# Altium PCB Digital_Clock_Backup_PCB.PcbDoc
Units mil, origin at the board's own origin, x right, y up, seen from the top; angles counter-clockwise.
Board outline 4763.81 x 1614.2 mil, 2 copper layers (Top Layer, Bottom Layer); 26 components, 30 nets, 116 pads, 14 vias.
Unrouted connection lines stored in the file: 2.
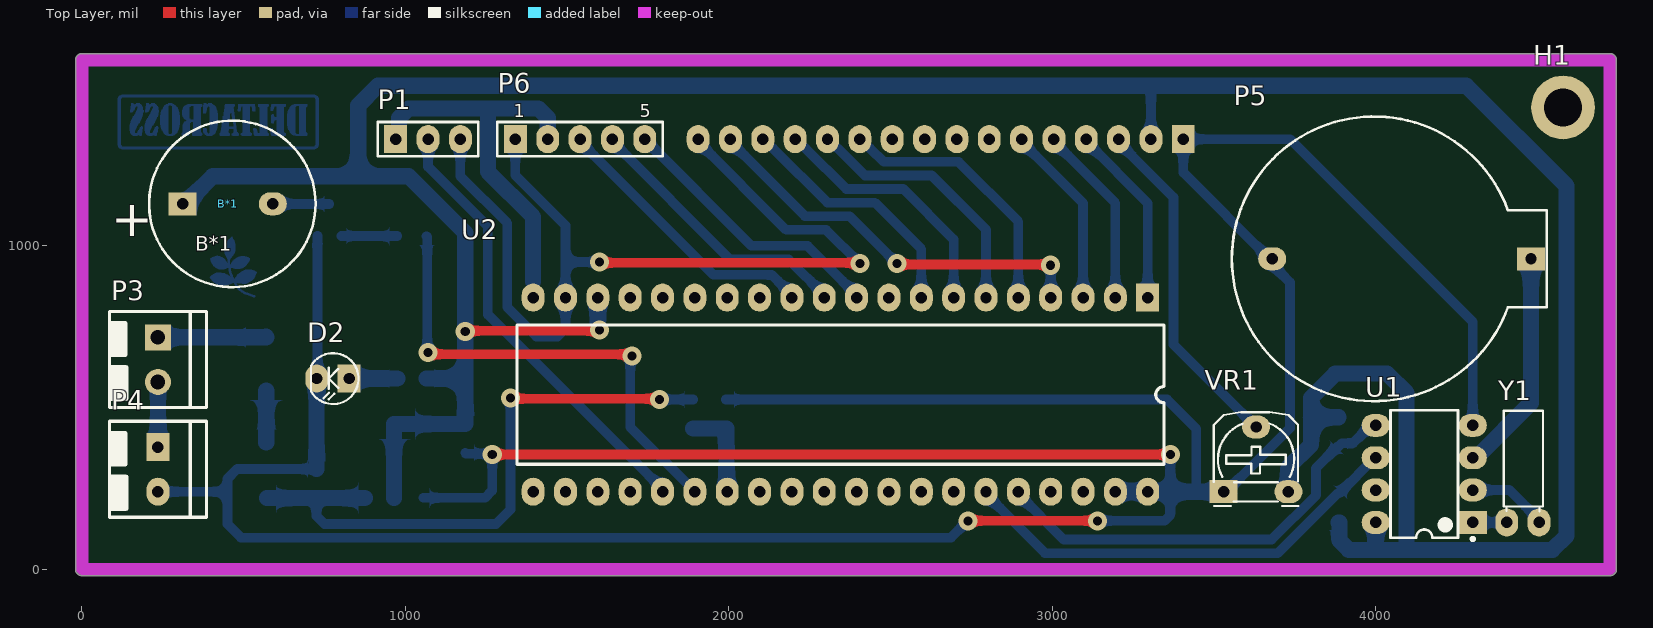
[diagram p0: Top Layer view]
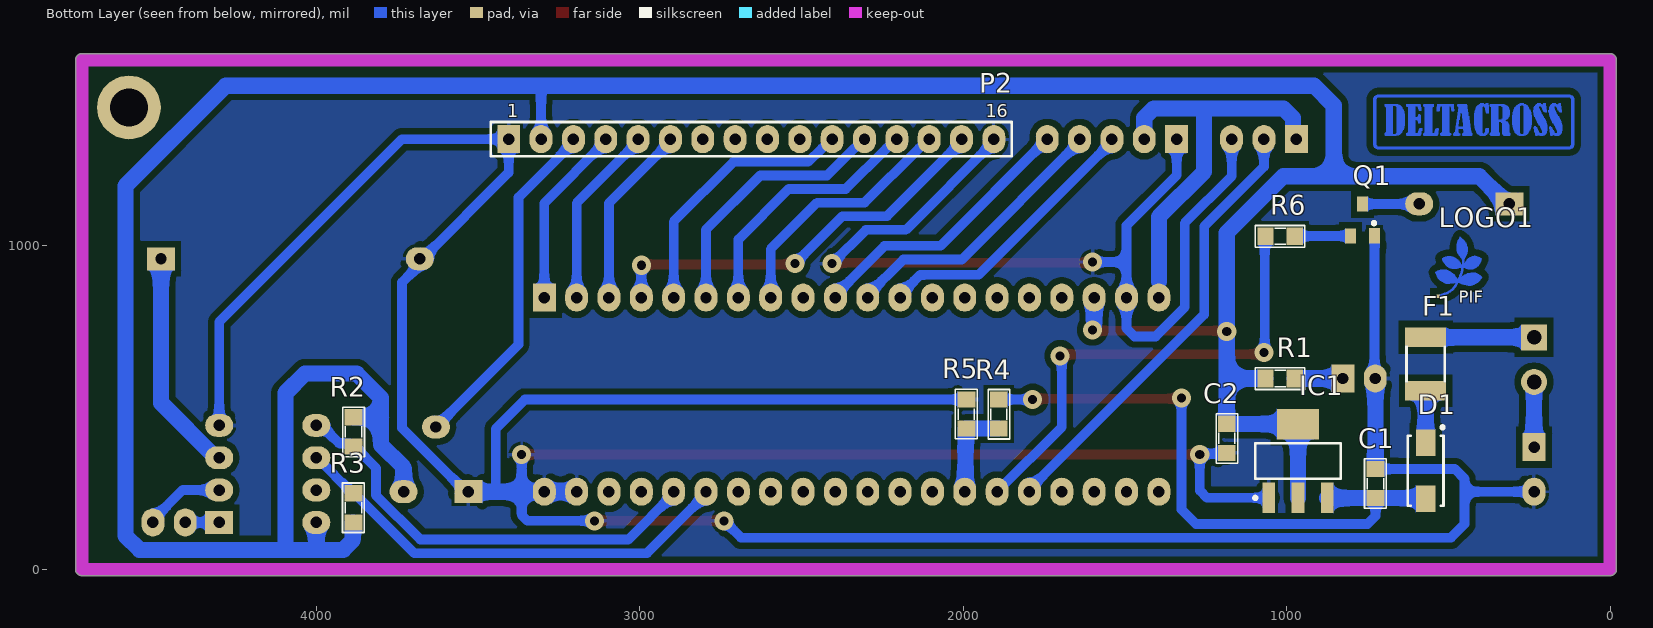
[diagram p1: Bottom Layer view, seen from below]
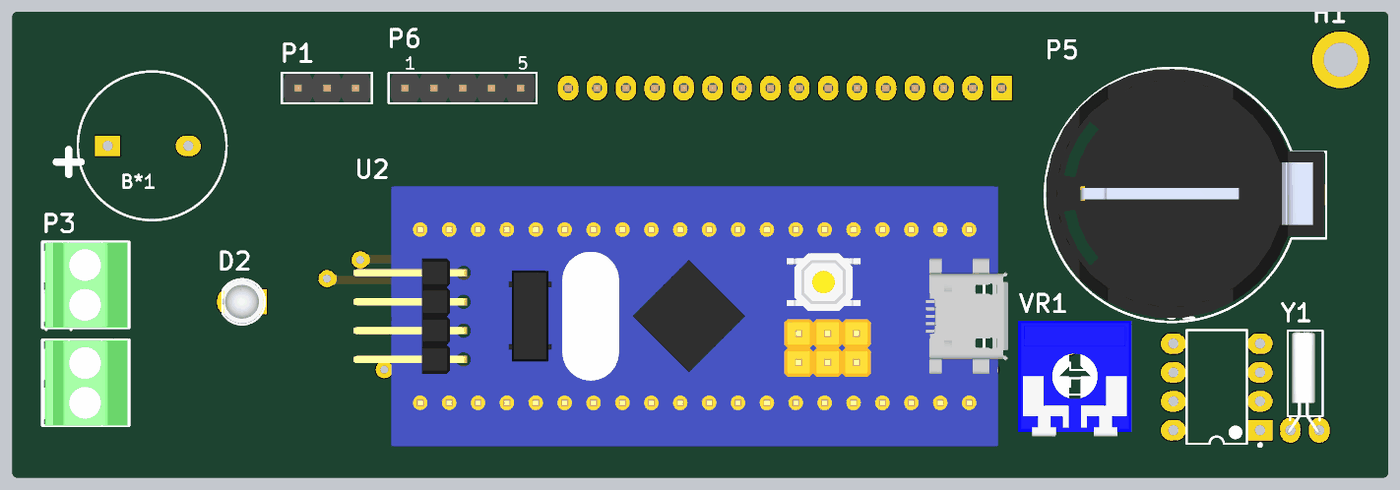
[diagram p2: 3D render of the assembled board from above, using the file's embedded part models]
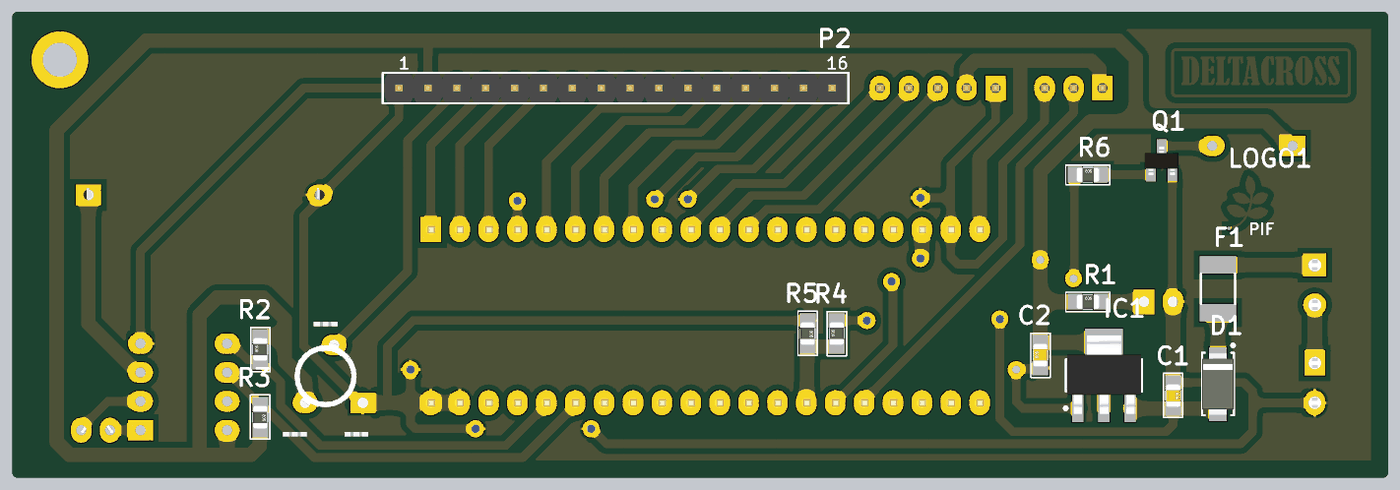
[diagram p3: 3D render of the assembled board from below, using the file's embedded part models]

## Layer stack, top to bottom
Top Solder: solder mask 0.4, Solder Resist, Dk 3.5
Top Layer: signal copper 1.4
Dielectric 1: dielectric 12.6, FR-4, Dk 4.8
Bottom Layer: signal copper 1.4
Bottom Solder: solder mask 0.4, Solder Resist, Dk 3.5

## Board outline
0,-19.7 cw(c0,0) -19.7,0 -19.7,1574.8 cw(c0,1574.8) 0,1594.5 4724.41,1594.5 cw(c4724.41,1574.8) 4744.11,1574.8 4744.11,0 cw(c4724.41,0) 4724.41,-19.7

## Design rules (kind name [scope] priority, off if disabled: settings)
Clearance [All] p1: gap=20 ignorepadtopadclearanceinfootprint=FALSE
PolygonConnect [All] p1: connectstyle=Relief reliefconductorwidth=10 reliefentries=4 polygonreliefangle="90 Angle" airgapwidth=10
RoutingVias [All] p1: holewidth=28 width=50 viastyle="Through Hole" minholewidth=23.62 minwidth=59.06 maxholewidth=28 maxwidth=50
SolderMaskExpansion [All] p1: expansion=4 istentingtop=FALSE
Width [All] p1: maxlimit=50 minlimit=20 preferedwidth=30
30 further rules are at their usual default settings.

## Components (designator, comment, footprint, x,y, rotation, side; value= is the part's Value field where it differs from the comment)
B*1 "Buzzer" BUZZER 390,1130 r0 top
C1 "Cap Non-Pol SMD" CAP-SM-0805 725,310 r270 bottom value=10uF
C2 "Cap Non-Pol SMD" CAP-SM-0805 1185,360 r90 bottom value=10uF
D1 "D Schottky" SS34 570,305 r270 bottom
D2 "LED" LED-3mm 826,590 r180 top
F1 "Fuse" "FUSE SMD" 570,635 r270 bottom
H1 "Hole" "LO KHOAN 3MM" 4579,1428 r0 top
IC1 "LM1117" SOT223-4N 965,335 r90 bottom value=LM317
LOGO1 "LOGO PIF" "PIF LOGO SMALL TOP" 341,1033 r180 bottom
P1 "61300311121" 61300311121 1070,1330 r0 top
P2 "61301611121" 61301611121 2655,1330 r180 bottom
P3 "Domino 2" "DOMINO SMALL 2"#1 285,717 r270 top
P4 "Domino 2" "DOMINO SMALL 2"#2 285,377.8 r270 top
P5 "VBAT" "VBAT CR2030" 4080,960 r0 top
P6 "61300511121" 61300511121 1540,1330 r0 top
Q1 "C1815" SOT23B 765,1080 r180 bottom
R1 "RESISTOR SMD" RES-SM-0805 1065,590 r180 bottom value=1K
R2 "RESISTOR SMD" RES-SM-0805 3885,380 r90 bottom value=10K
R3 "RESISTOR SMD" RES-SM-0805 3885,235 r270 bottom value=10K
R4 "RESISTOR SMD" RES-SM-0805 1890,435 r90 bottom value=20K
R5 "RESISTOR SMD" RES-SM-0805 1990,525 r270 bottom value=10K
R6 "RESISTOR SMD" RES-SM-0805 1065,1030 r180 bottom value=22K
U1 "DS1307+" MAXM-P8-1 4150,295 r180 top
U2 "BLUEPILL" BLUEPILL 2340,520 r270 top
VR1 "10K" "Varistor 1" 3530,240 r0 top value="VR 10K"
Y1 "32.768kHz" "XTAL 32768 3x8" 4505,145 r90 top

## Footprints (in the part's own frame and the unit in brackets; to place one, negate y for a bottom-side part, rotate by r counter-clockwise, add the part's x,y. Pads: shape width x height; smd on the part's side, far side on the other; paste and mask are expansions set on the pad)
61300311121 [mm] "Pin Header, pitch 2.54 mm, THT, Vertical, single row, 3p"
  rect 1.8x2.2 hole 0.9: 1(-2.54,0)
  oval 1.8x2.2 hole 0.9: 2(0,0) 3(2.54,0)
  silkscreen extent -3.96,-1.35 3.96,1.35, body extent -3.81,-1.27 3.81,1.27, height 8.57
61300511121 [mm] "Pin Header, pitch 2.54 mm, THT, Vertical, single row, 5p"
  rect 1.8x2.2 hole 0.9: 1(-5.08,0)
  oval 1.8x2.2 hole 0.9: 2(-2.54,0) 3(0,0) 4(2.54,0) 5(5.08,0)
  silkscreen extent -6.5,-1.35 6.5,1.35, body extent -6.35,-1.27 6.35,1.27, height 8.57
61301611121 [mm] "Pin Header, pitch 2.54 mm, THT, Vertical, single row, 16p"
  rect 1.8x2.2 hole 0.9: 1(-19.05,0)
  oval 1.8x2.2 hole 0.9: 2(-16.51,0) 3(-13.97,0) 4(-11.43,0) 5(-8.89,0) 6(-6.35,0) 7(-3.81,0) 8(-1.27,0) 9(1.27,0) 10(3.81,0) 11(6.35,0) 12(8.89,0) 13(11.43,0) 14(13.97,0) 15(16.51,0) 16(19.05,0)
  silkscreen extent -20.47,-1.35 20.47,1.35, body extent -20.32,-1.27 20.32,1.27, height 8.57
BLUEPILL [mm] "Development board STM32F103C8T6"
  rect 2.2x1.8 hole 0.9: 1(-8.128,24.257)
  oval 2.2x1.8 hole 0.9: 2(-8.128,21.717) 3(-8.128,19.177) 4(-8.128,16.637) 5(-8.128,14.097) 6(-8.128,11.557) 7(-8.128,9.017) 8(-8.128,6.477) 9(-8.128,3.937) 10(-8.128,1.397) 11(-8.128,-1.143) 12(-8.128,-3.683) 13(-8.128,-6.223) 14(-8.128,-8.763) 15(-8.128,-11.303) 16(-8.128,-13.843) 17(-8.128,-16.383) 18(-8.128,-18.923) 19(-8.128,-21.463) 20(-8.128,-24.003) 21(7.112,-24.003) 22(7.112,-21.463) 23(7.112,-18.923) 24(7.112,-16.383) 25(7.112,-13.843) 26(7.112,-11.303) 27(7.112,-8.763) 28(7.112,-6.223) 29(7.112,-3.683) 30(7.112,-1.143) 31(7.112,1.397) 32(7.112,3.937) 33(7.112,6.477) 34(7.112,9.017) 35(7.112,11.557) 36(7.112,14.097) 37(7.112,16.637) 38(7.112,19.177) 39(7.112,21.717) 40(7.112,24.257)
  silkscreen extent -5.97,-25.27 4.95,25.53, body extent -11.94,-29.92 10.92,27.64, height 12.31
BUZZER [mm]
  rect 2.2x1.8 hole 0.9: 1(-2,0)
  oval 2.2x1.8 hole 0.9: 2(5.08,0)
  silkscreen extent -4.63,-6.54 8.44,6.54
CAP-SM-0805 [mil]
  rect 50x55 smd: 1(0,0) 2(90,0)
  silkscreen extent -32,-34 121,33, body extent 6,-25 84,25, height 31
"DOMINO SMALL 2"#1 [mil] "3.5 mm"
  rect 80x80 hole 45: 1(0,-50)
  round 80 hole 45: 2(137.8,-50)
  silkscreen extent -80,-203 217,100, body extent -79,-192 217,95, height 335
"DOMINO SMALL 2"#2 [mil] "3.5 mm"
  rect 86.61x70.87 hole 35.43: 1(0,-50)
  oval 86.61x70.87 hole 35.43: 2(137.8,-50)
  silkscreen extent -80,-203 217,100, body extent -79,-192 217,95, height 335
"FUSE SMD" [mm] "SMD FUSE"
  rect 1.55x3.21 smd: 1(-2.1,0) 2(2.1,0)
  silkscreen extent -1.35,-1.5 1.35,1.51, body extent -2.37,-1.71 2.36,1.71, height 0.75
LED-3mm [mm] "LED 2 PIN, 3ly Only colour"
  rect 1.8x2.2 hole 0.9: 1(0,0)
  oval 1.8x2.2 hole 0.9: 2(2.54,0)
  silkscreen extent -0.73,-1.99 3,2.01, body extent -0.63,-1.9 2.87,1.9, height 5.52
"LO KHOAN 3MM" [mm]
  round 5 hole 3: 1(0,0)
MAXM-P8-1 [mm] "DIP, 8-Leads, Body 9.375x6.985mm, Pitch 2.54mm"
  rect 2.2x1.8 hole 0.9: 1(-3.81,3.81)
  oval 2.2x1.8 hole 0.9: 2(-3.81,1.27) 3(-3.81,-1.27) 4(-3.81,-3.81) 5(3.81,-3.81) 6(3.81,-1.27) 7(3.81,1.27) 8(3.81,3.81)
  silkscreen extent -3.94,-5 2.65,5.23, body extent -3.95,-4.95 3.95,4.95, height 4.58
"PIF LOGO SMALL TOP" [mil]
  rect 10x10 smd: 1(-190,-189)
  Top Layer region: -76.29,-64.08 -76.23,-64.06 -71.49,-64.7 -71.45,-64.72 -71.4,-64.72 -66.34,-66.32 -66.33,-66.32 -66.33,-66.32 -61.56,-67.89 -61.49,-67.95 -61.4,-67.97 -55.7,-72.41 -55.64,-72.52 -55.55,-72.6 -55.54,-72.69 -55.5,-72.77 -55.53,-72.89 -55.52,-73.01 -57.42,-78.41 -57.44,-78.43 -57.44,-78.45 -60.94,-86.68 -60.96,-86.71 -60.97,-86.75 -62.87,-89.91 -62.87,-89.91 -62.87,-89.92 -65.41,-94.02 -65.46,-94.06 -65.49,-94.12 -72.46,-100.79 -72.53,-100.82 -72.58,-100.88 -78.58,-104.05 -78.63,-104.05 -78.66,-104.08 -82.46,-105.35 -82.55,-105.34 -82.63,-105.37 -93.4,-105.37 -93.43,-105.36 -93.46,-105.37 -98.86,-104.74 -98.87,-104.73 -98.88,-104.74 -103.31,-104.1 -103.37,-104.07 -103.44,-104.07 -107.24,-102.47 -107.26,-102.44 -107.29,-102.44 -110.76,-100.54 -110.81,-100.48 -110.88,-100.45 -110.93,-100.32 -111.02,-100.22 -111.01,-100.14 -111.04,-100.07 -111.04,-93.43 -111,-93.33 -111,-93.22 -106.56,-83.08 -106.53,-83.05 -106.52,-83.01 -100.82,-74.14 -100.75,-74.09 -100.71,-74.02 -97.24,-71.15 -97.21,-71.14 -97.19,-71.11 -92.76,-68.28 -92.7,-68.27 -92.66,-68.23 -84.43,-65.06 -84.37,-65.06 -84.33,-65.03 -78.93,-64.07 -78.75,-64.11 -78.56,-64.13 -78.55,-64.15 -78.52,-64.16 -78.44,-64.28 -76.36,-64.06
  Top Layer region: -76.29,-64.08 -76.23,-64.06 -71.49,-64.7 -71.45,-64.72 -71.4,-64.72 -66.34,-66.32 -66.33,-66.32 -66.33,-66.32 -61.56,-67.89 -61.49,-67.95 -61.4,-67.97 -55.7,-72.41 -55.64,-72.52 -55.55,-72.6 -55.54,-72.69 -55.5,-72.77 -55.53,-72.89 -55.52,-73.01 -57.42,-78.41 -57.44,-78.43 -57.44,-78.45 -60.94,-86.68 -60.96,-86.71 -60.97,-86.75 -62.87,-89.91 -62.87,-89.91 -62.87,-89.92 -65.41,-94.02 -65.46,-94.06 -65.49,-94.12 -72.46,-100.79 -72.53,-100.82 -72.58,-100.88 -78.58,-104.05 -78.63,-104.05 -78.66,-104.08 -82.46,-105.35 -82.55,-105.34 -82.63,-105.37 -93.4,-105.37 -93.43,-105.36 -93.46,-105.37 -98.86,-104.74 -98.87,-104.73 -98.88,-104.74 -103.31,-104.1 -103.37,-104.07 -103.44,-104.07 -107.24,-102.47 -107.26,-102.44 -107.29,-102.44 -110.76,-100.54 -110.81,-100.48 -110.88,-100.45 -110.93,-100.32 -111.02,-100.22 -111.01,-100.14 -111.04,-100.07 -111.04,-93.43 -111,-93.33 -111,-93.22 -106.56,-83.08 -106.53,-83.05 -106.52,-83.01 -100.82,-74.14 -100.75,-74.09 -100.71,-74.02 -97.24,-71.15 -97.21,-71.14 -97.19,-71.11 -92.76,-68.28 -92.7,-68.27 -92.66,-68.23 -84.43,-65.06 -84.37,-65.06 -84.33,-65.03 -78.93,-64.07 -78.75,-64.11 -78.56,-64.13 -78.55,-64.15 -78.52,-64.16 -78.44,-64.28 -76.36,-64.06
  Top Layer region: -123.07,-4.91 -122.89,-4.93 -122.87,-4.96 -122.84,-4.97 -118.74,-8.14 -118.72,-8.16 -118.7,-8.17 -115.22,-11.32 -112.06,-13.84 -112.04,-13.89 -111.99,-13.91 -107.89,-18.65 -107.88,-18.68 -107.85,-18.69 -104.35,-23.76 -104.34,-23.83 -104.29,-23.87 -101.76,-30.54 -101.76,-30.57 -101.74,-30.6 -99.54,-39.13 -99.55,-39.19 -99.53,-39.25 -99.19,-47.81 -99.22,-47.88 -99.2,-47.95 -101.11,-56.48 -101.14,-56.53 -101.14,-56.58 -104,-63.25 -104.02,-63.26 -104.02,-63.29 -107.19,-69.29 -107.2,-69.3 -107.2,-69.31 -110.03,-74.08 -110.08,-74.11 -110.1,-74.16 -112.97,-77.33 -112.98,-77.34 -112.98,-77.35 -113.01,-77.36 -113.02,-77.38 -113.18,-77.43 -113.34,-77.51 -113.35,-77.5 -113.37,-77.51 -113.39,-77.5 -113.41,-77.51 -113.57,-77.43 -113.73,-77.37 -113.74,-77.35 -113.75,-77.35 -113.76,-77.33 -113.78,-77.31 -125.48,-63.38 -125.48,-63.38 -125.48,-63.38 -128.65,-59.58 -128.67,-59.51 -128.73,-59.45 -130.96,-54.39 -130.96,-54.34 -130.99,-54.3 -132.89,-47 -132.88,-46.96 -132.91,-46.92 -133.54,-40.28 -133.52,-40.23 -133.54,-40.18 -132.57,-29.42 -132.56,-29.4 -132.57,-29.37 -131.3,-22.07 -131.28,-22.04 -131.28,-22 -129.38,-16.3 -129.35,-16.27 -129.35,-16.23 -127.16,-11.8 -125.89,-8.98 -125.87,-8.96 -125.87,-8.93 -123.63,-5.13 -123.6,-5.1 -123.6,-5.07 -123.44,-4.98 -123.3,-4.88 -123.27,-4.88 -123.24,-4.86
  Top Layer region: -155.42,-64.71 -155.38,-64.7 -149.38,-65.67 -149.35,-65.68 -149.32,-65.68 -143.92,-67.25 -143.88,-67.28 -143.82,-67.28 -138.12,-70.15 -138.1,-70.17 -138.08,-70.18 -131.98,-74.08 -131.96,-74.1 -131.94,-74.1 -129.07,-76.3 -129.04,-76.36 -128.98,-76.4 -127.74,-77.95 -125.89,-79.48 -125.85,-79.55 -125.79,-79.59 -124.24,-81.8 -122.36,-83.98 -122.34,-84.02 -122.31,-84.04 -120.72,-86.57 -118.52,-89.72 -118.52,-89.74 -118.5,-89.75 -116.6,-92.92 -116.58,-93.07 -116.53,-93.2 -116.54,-93.23 -116.53,-93.26 -117.16,-98.96 -117.18,-98.99 -117.17,-99.02 -117.28,-99.17 -117.36,-99.32 -117.4,-99.33 -117.42,-99.36 -118.98,-100.33 -119.1,-100.35 -119.19,-100.4 -121.39,-100.7 -126.71,-102.29 -126.73,-102.28 -126.75,-102.29 -130.88,-103.23 -130.89,-103.23 -130.89,-103.23 -135.62,-104.2 -135.68,-104.19 -135.73,-104.21 -139.53,-104.21 -139.55,-104.2 -139.58,-104.21 -148.88,-103.47 -148.95,-103.44 -149.02,-103.44 -154.09,-101.54 -154.11,-101.52 -154.14,-101.52 -161.74,-97.72 -161.79,-97.66 -161.86,-97.64 -167.56,-92.57 -167.58,-92.52 -167.63,-92.5 -172.06,-86.8 -172.07,-86.77 -172.09,-86.76 -174.92,-82.32 -174.93,-82.28 -174.97,-82.24 -177.2,-76.84 -177.2,-76.8 -177.22,-76.77 -178.49,-72.04 -178.47,-71.89 -178.48,-71.73 -178.44,-71.69 -178.44,-71.63 -178.37,-71.58 -178.38,-71.49 -178.36,-71.47 -178.36,-71.45 -178.23,-71.32 -178.11,-71.18 -174.94,-69.61 -172.81,-68.55 -172.8,-68.55 -172.79,-68.54 -168.06,-66.34 -168.01,-66.34 -167.97,-66.31 -161.63,-64.71 -161.56,-64.72 -161.5,-64.69 -155.47,-64.69
  Top Layer region: -170.52,-106.31 -170.47,-106.3 -163.83,-107.57 -163.79,-107.6 -163.74,-107.59 -157.07,-110.13 -157.04,-110.16 -156.99,-110.17 -151.3,-113.63 -147.84,-115.53 -147.82,-115.55 -147.79,-115.56 -144.62,-117.79 -144.6,-117.82 -144.57,-117.83 -141.41,-120.66 -141.39,-120.7 -141.35,-120.72 -135.32,-128.02 -135.31,-128.04 -135.29,-128.05 -129.59,-135.95 -129.57,-136.04 -129.51,-136.12 -129.52,-136.19 -129.49,-136.27 -129.51,-136.31 -129.5,-136.35 -129.55,-136.43 -129.56,-136.53 -132.97,-142.69 -132.67,-144.41 -132.7,-144.55 -132.69,-144.69 -132.74,-144.74 -132.76,-144.81 -132.88,-144.89 -132.97,-144.99 -140.57,-148.49 -140.66,-148.49 -140.73,-148.54 -155,-150.44 -155.03,-150.43 -155.07,-150.44 -161.7,-150.44 -161.75,-150.42 -161.8,-150.43 -166.87,-149.46 -166.9,-149.44 -166.94,-149.44 -173.28,-147.24 -173.32,-147.21 -173.37,-147.2 -177.8,-144.67 -177.82,-144.65 -177.84,-144.64 -184.18,-140.21 -184.19,-140.18 -184.23,-140.17 -187.09,-137.64 -187.11,-137.6 -187.15,-137.57 -189.99,-134.07 -189.99,-134.05 -190.02,-134.03 -192.55,-130.23 -192.55,-130.21 -192.57,-130.2 -195.1,-125.77 -195.11,-125.74 -195.12,-125.73 -197.02,-121.63 -197.03,-121.58 -197.05,-121.55 -198.95,-114.88 -198.94,-114.78 -198.97,-114.68 -198.92,-114.58 -198.91,-114.47 -198.82,-114.4 -198.77,-114.31 -193.71,-110.21 -193.63,-110.19 -193.57,-110.13 -188.83,-108.23 -188.81,-108.23 -188.8,-108.22 -183.73,-106.62 -183.65,-106.62 -183.57,-106.59 -183.24,-106.59 -176.62,-106.29 -176.61,-106.3 -176.6,-106.29 -170.57,-106.29
  Top Layer region: -82.86,-115.8 -82.83,-115.79 -78.4,-116.09 -78.37,-116.11 -78.34,-116.1 -74.54,-116.73 -74.51,-116.76 -74.46,-116.75 -70.66,-118.02 -70.64,-118.04 -70.62,-118.04 -68.39,-119 -65.23,-120.26 -65.18,-120.32 -65.1,-120.34 -61,-123.51 -60.99,-123.53 -60.96,-123.54 -54.93,-129.24 -54.88,-129.35 -54.79,-129.45 -54.8,-129.54 -54.76,-129.62 -54.8,-129.73 -54.81,-129.86 -56.41,-133.33 -56.42,-133.34 -56.43,-133.36 -57.99,-136.23 -58.03,-136.26 -58.04,-136.3 -60.58,-139.47 -60.59,-139.48 -60.6,-139.49 -63.12,-142.32 -65.98,-145.81 -66.14,-145.9 -66.3,-146 -67.3,-146.19 -68.55,-147.42 -68.62,-147.45 -68.66,-147.5 -74.02,-150.67 -74.06,-150.67 -74.08,-150.7 -79.15,-152.93 -79.16,-152.93 -79.17,-152.94 -83.93,-154.84 -83.99,-154.84 -84.03,-154.86 -88.76,-155.8 -88.81,-155.79 -88.85,-155.81 -97.71,-156.14 -97.75,-156.13 -97.79,-156.14 -104.12,-155.51 -104.17,-155.48 -104.22,-155.49 -110.56,-153.59 -110.57,-153.58 -110.58,-153.58 -116.91,-151.34 -116.94,-151.32 -116.98,-151.32 -127.11,-146.25 -127.17,-146.18 -127.25,-146.15 -127.29,-146.05 -127.37,-145.97 -127.37,-145.95 -127.38,-145.94 -127.37,-145.85 -127.41,-145.77 -127.37,-145.67 -127.37,-145.56 -123.57,-136.39 -123.49,-136.32 -123.45,-136.22 -120.81,-133.55 -121.07,-131.92 -121.06,-131.9 -121.07,-131.88 -121.02,-131.7 -120.97,-131.51 -120.95,-131.51 -120.95,-131.49 -118.98,-129.13 -119,-129.14 -119.19,-129.16 -119.38,-129.2 -119.39,-129.19 -119.41,-129.19 -119.56,-129.07 -119.72,-128.96 -119.72,-128.94 -119.74,-128.94 -119.76,-128.74 -119.8,-128.55 -119.79,-128.54 -119.79,-128.52 -119.67,-128.37 -119.56,-128.21 -114.19,-124.75 -114.02,-124.71 -113.85,-124.66 -113.82,-124.68 -113.79,-124.67 -113.64,-124.77 -113.63,-124.78 -110.38,-122.84 -110.35,-122.83 -110.33,-122.81 -105.56,-120.58 -105.55,-120.58 -105.54,-120.57 -100.17,-118.37 -100.15,-118.37 -100.14,-118.35 -96.34,-117.09 -96.29,-117.09 -96.25,-117.07 -90.22,-116.1 -90.19,-116.11 -90.16,-116.09 -82.89,-115.79
  Top Layer region: -82.86,-115.8 -82.83,-115.79 -78.4,-116.09 -78.37,-116.11 -78.34,-116.1 -74.54,-116.73 -74.51,-116.76 -74.46,-116.75 -70.66,-118.02 -70.64,-118.04 -70.62,-118.04 -68.39,-119 -65.23,-120.26 -65.18,-120.32 -65.1,-120.34 -61,-123.51 -60.99,-123.53 -60.96,-123.54 -54.93,-129.24 -54.88,-129.35 -54.79,-129.45 -54.8,-129.54 -54.76,-129.62 -54.8,-129.73 -54.81,-129.86 -56.41,-133.33 -56.42,-133.34 -56.43,-133.36 -57.99,-136.23 -58.03,-136.26 -58.04,-136.3 -60.58,-139.47 -60.59,-139.48 -60.6,-139.49 -63.12,-142.32 -65.98,-145.81 -66.14,-145.9 -66.3,-146 -67.3,-146.19 -68.55,-147.42 -68.62,-147.45 -68.66,-147.5 -74.02,-150.67 -74.06,-150.67 -74.08,-150.7 -79.15,-152.93 -79.16,-152.93 -79.17,-152.94 -83.93,-154.84 -83.99,-154.84 -84.03,-154.86 -88.76,-155.8 -88.81,-155.79 -88.85,-155.81 -97.71,-156.14 -97.75,-156.13 -97.79,-156.14 -104.12,-155.51 -104.17,-155.48 -104.22,-155.49 -110.56,-153.59 -110.57,-153.58 -110.58,-153.58 -116.91,-151.34 -116.94,-151.32 -116.98,-151.32 -127.11,-146.25 -127.17,-146.18 -127.25,-146.15 -127.29,-146.05 -127.37,-145.97 -127.37,-145.95 -127.38,-145.94 -127.37,-145.85 -127.41,-145.77 -127.37,-145.67 -127.37,-145.56 -123.57,-136.39 -123.49,-136.32 -123.45,-136.22 -120.81,-133.55 -121.07,-131.92 -121.06,-131.9 -121.07,-131.88 -121.02,-131.7 -120.97,-131.51 -120.95,-131.51 -120.95,-131.49 -118.98,-129.13 -119,-129.14 -119.19,-129.16 -119.38,-129.2 -119.39,-129.19 -119.41,-129.19 -119.56,-129.07 -119.72,-128.96 -119.72,-128.94 -119.74,-128.94 -119.76,-128.74 -119.8,-128.55 -119.79,-128.54 -119.79,-128.52 -119.67,-128.37 -119.56,-128.21 -114.19,-124.75 -114.02,-124.71 -113.85,-124.66 -113.82,-124.68 -113.79,-124.67 -113.64,-124.77 -113.63,-124.78 -110.38,-122.84 -110.35,-122.83 -110.33,-122.81 -105.56,-120.58 -105.55,-120.58 -105.54,-120.57 -100.17,-118.37 -100.15,-118.37 -100.14,-118.35 -96.34,-117.09 -96.29,-117.09 -96.25,-117.07 -90.22,-116.1 -90.19,-116.11 -90.16,-116.09 -82.89,-115.79
  Top Layer region: -123.07,-4.91 -122.89,-4.93 -122.87,-4.96 -122.84,-4.97 -118.74,-8.14 -118.72,-8.16 -118.7,-8.17 -115.22,-11.32 -112.06,-13.84 -112.04,-13.89 -111.99,-13.91 -107.89,-18.65 -107.88,-18.68 -107.85,-18.69 -104.35,-23.76 -104.34,-23.83 -104.29,-23.87 -101.76,-30.54 -101.76,-30.57 -101.74,-30.6 -99.54,-39.13 -99.55,-39.19 -99.53,-39.25 -99.19,-47.81 -99.22,-47.88 -99.2,-47.95 -101.11,-56.48 -101.14,-56.53 -101.14,-56.58 -104,-63.25 -104.02,-63.26 -104.02,-63.29 -107.19,-69.29 -107.2,-69.3 -107.2,-69.31 -110.03,-74.08 -110.08,-74.11 -110.1,-74.16 -112.97,-77.33 -112.98,-77.34 -112.98,-77.35 -113.01,-77.36 -113.02,-77.38 -113.18,-77.43 -113.34,-77.51 -113.35,-77.5 -113.37,-77.51 -113.39,-77.5 -113.41,-77.51 -113.57,-77.43 -113.73,-77.37 -113.74,-77.35 -113.75,-77.35 -113.76,-77.33 -113.78,-77.31 -125.48,-63.38 -125.48,-63.38 -125.48,-63.38 -128.65,-59.58 -128.67,-59.51 -128.73,-59.45 -130.96,-54.39 -130.96,-54.34 -130.99,-54.3 -132.89,-47 -132.88,-46.96 -132.91,-46.92 -133.54,-40.28 -133.53,-40.26 -133.54,-40.23 -133.54,-31 -133.51,-30.94 -133.52,-30.87 -131.29,-22.03 -131.28,-22.02 -131.28,-22 -129.38,-16.3 -129.35,-16.27 -129.35,-16.23 -127.16,-11.8 -125.89,-8.98 -125.87,-8.96 -125.87,-8.93 -123.63,-5.13 -123.6,-5.1 -123.6,-5.07 -123.44,-4.98 -123.3,-4.88 -123.27,-4.88 -123.24,-4.86
  Top Layer region: -155.42,-64.71 -155.38,-64.7 -149.38,-65.67 -149.35,-65.68 -149.32,-65.68 -143.92,-67.25 -143.88,-67.28 -143.82,-67.28 -138.12,-70.15 -138.1,-70.17 -138.08,-70.18 -131.98,-74.08 -131.96,-74.1 -131.94,-74.1 -129.07,-76.3 -129.04,-76.36 -128.98,-76.4 -127.74,-77.95 -125.89,-79.48 -125.85,-79.55 -125.79,-79.59 -124.24,-81.8 -122.36,-83.98 -122.34,-84.02 -122.31,-84.04 -120.72,-86.57 -118.52,-89.72 -118.52,-89.74 -118.5,-89.75 -116.6,-92.92 -116.58,-93.07 -116.53,-93.2 -116.54,-93.23 -116.53,-93.26 -117.16,-98.96 -117.18,-98.99 -117.17,-99.02 -117.28,-99.17 -117.36,-99.32 -117.4,-99.33 -117.42,-99.36 -118.98,-100.33 -119.1,-100.35 -119.19,-100.4 -121.39,-100.7 -126.71,-102.29 -126.73,-102.28 -126.75,-102.29 -130.88,-103.23 -130.89,-103.23 -130.89,-103.23 -135.62,-104.2 -135.68,-104.19 -135.73,-104.21 -139.53,-104.21 -139.55,-104.2 -139.58,-104.21 -148.88,-103.47 -148.95,-103.44 -149.02,-103.44 -154.09,-101.54 -154.11,-101.52 -154.14,-101.52 -161.74,-97.72 -161.79,-97.66 -161.86,-97.64 -167.56,-92.57 -167.58,-92.52 -167.63,-92.5 -172.06,-86.8 -172.07,-86.77 -172.09,-86.76 -174.92,-82.32 -174.93,-82.28 -174.97,-82.24 -177.2,-76.84 -177.2,-76.8 -177.22,-76.77 -178.49,-72.04 -178.47,-71.89 -178.48,-71.73 -178.44,-71.69 -178.44,-71.63 -178.37,-71.58 -178.38,-71.49 -178.36,-71.47 -178.36,-71.45 -178.23,-71.32 -178.11,-71.18 -174.94,-69.61 -172.81,-68.55 -172.8,-68.55 -172.79,-68.54 -168.06,-66.34 -168.01,-66.34 -167.97,-66.31 -161.63,-64.71 -161.56,-64.72 -161.5,-64.69 -155.47,-64.69
  Top Layer region: -170.52,-106.31 -170.47,-106.3 -163.83,-107.57 -163.79,-107.6 -163.74,-107.59 -157.07,-110.13 -157.04,-110.16 -156.99,-110.17 -151.3,-113.63 -147.84,-115.53 -147.82,-115.55 -147.79,-115.56 -144.62,-117.79 -144.6,-117.82 -144.57,-117.83 -141.41,-120.66 -141.39,-120.7 -141.35,-120.72 -135.32,-128.02 -135.31,-128.04 -135.29,-128.05 -129.59,-135.95 -129.57,-136.04 -129.51,-136.12 -129.52,-136.19 -129.49,-136.27 -129.51,-136.31 -129.5,-136.35 -129.55,-136.43 -129.56,-136.53 -132.97,-142.69 -132.67,-144.41 -132.7,-144.55 -132.69,-144.69 -132.74,-144.74 -132.76,-144.81 -132.88,-144.89 -132.97,-144.99 -140.57,-148.49 -140.66,-148.49 -140.73,-148.54 -155,-150.44 -155.03,-150.43 -155.07,-150.44 -161.7,-150.44 -161.75,-150.42 -161.8,-150.43 -166.87,-149.46 -166.9,-149.44 -166.94,-149.44 -173.28,-147.24 -173.32,-147.21 -173.37,-147.2 -177.8,-144.67 -177.82,-144.65 -177.84,-144.64 -184.18,-140.21 -184.19,-140.18 -184.23,-140.17 -187.09,-137.64 -187.11,-137.6 -187.15,-137.57 -189.99,-134.07 -189.99,-134.05 -190.02,-134.03 -192.55,-130.23 -192.55,-130.21 -192.57,-130.2 -195.1,-125.77 -195.11,-125.74 -195.12,-125.73 -197.02,-121.63 -197.03,-121.58 -197.05,-121.55 -198.95,-114.88 -198.94,-114.78 -198.97,-114.68 -198.92,-114.58 -198.91,-114.47 -198.82,-114.4 -198.77,-114.31 -193.71,-110.21 -193.63,-110.19 -193.57,-110.13 -188.83,-108.23 -188.81,-108.23 -188.8,-108.22 -183.73,-106.62 -183.65,-106.62 -183.57,-106.59 -183.24,-106.59 -176.62,-106.29 -176.61,-106.3 -176.6,-106.29 -170.57,-106.29
  Top Layer lines w7.87: -112.9,-82.47 -113.17,-75.53 ; -112.9,-82.47 -113.43,-88.33 ; -112.9,-82.47 -113.17,-75.53 ; -112.9,-82.47 -113.43,-88.33 ; -113.17,-75.53 -113.7,-72.07 -113.17,-75.53 ; -113.43,-88.33 -113.97,-94.73 ; -113.43,-88.33 -113.97,-94.73 ; -113.97,-94.73 -115.3,-104.07 ; -113.97,-94.73 -115.3,-104.07 ; -115.3,-104.07 -116.37,-109.67 ; -115.3,-104.07 -116.37,-109.67 ; -116.37,-109.67 -119.27,-119.83 ; -116.37,-109.67 -119.27,-119.83 ; -119.27,-119.83 -120.07,-122.5 ; -119.27,-119.83 -120.07,-122.5 ; -120.07,-122.5 -124.07,-132.1 ; -120.07,-122.5 -124.07,-132.1 ; -124.07,-132.1 -128.07,-139.57 ; -124.07,-132.1 -128.07,-139.57 ; -128.07,-139.57 -134.73,-152.1 ; -128.07,-139.57 -134.73,-152.1 ; -134.73,-152.1 -137.67,-157.17 ; -134.73,-152.1 -137.67,-157.17 ; -137.67,-157.17 -140.33,-161.17 ; -137.67,-157.17 -140.33,-161.17 ; -140.33,-161.17 -144.07,-165.43 ; -140.33,-161.17 -144.07,-165.43 ; -144.07,-165.43 -146.97,-168.13 ; -144.07,-165.43 -146.97,-168.13 ; -146.97,-168.13 -153.03,-173.1 ; -146.97,-168.13 -153.03,-173.1 ; -153.03,-173.1 -160.73,-177.5 ; -153.03,-173.1 -160.73,-177.5 ; -160.73,-177.5 -164.57,-179.7 ; -160.73,-177.5 -164.57,-179.7 ; -164.57,-179.7 -169.53,-181.33 ; -164.57,-179.7 -169.53,-181.33 ; -169.53,-181.33 -190.97,-189.03 -169.53,-181.33
RES-SM-0805 [mil]
  rect 50x55 smd: 1(0,0) 2(90,0)
  silkscreen extent -32,-34 121,33, body extent 6,-25 84,25, height 31
SOT23B [mm] "SOT 23B"
  rect 0.85x1.2 smd: 1(0.94,-1.245) 2(0,1.25) 3(-0.95,-1.25)
  silkscreen extent 0.77,-0.38 1.02,-0.13, body extent -1.5,-1.3 1.5,1.2, height 1.06
SOT223-4N [mm] "SOT223, 4-Leads, Body 6.5x3.5mm, Pitch 2.3mm, Lead Span 7mm, IPC Medium Density"
  rect 2.4x1 smd: 1(-2.9,2.3) 2(-2.9,0) 3(-2.9,-2.3)
  rect 2.4x3.3 smd: 4(2.9,0)
  silkscreen extent -3.02,-3.35 1.4,3.48, body extent -3.39,-3.27 3.5,3.23, height 1.72
SS34 [mm] "DO-214-AC/SMA Molded Diode, Body 5.3x2.6mm, IPC Medium Density"
  rect 2.1x1.55 smd: 1(-2.2,0) 2(2.2,0)
  silkscreen extent -3.52,-1.4 2.75,1.45, body extent -2.75,-1.4 2.75,1.4, height 2.3
"Varistor 1" [mm] "Resistor Variable"
  rect 2.2x1.8 hole 0.9: 1(0,0)
  oval 2.2x1.8 hole 0.9: 2(2.54,5.08) 3(5.08,0)
  silkscreen extent -0.79,-1.12 5.87,6.25, body extent -1.72,-2.97 8.28,7.23, height 4.2
"VBAT CR2030" [mm]
  rect 2.2x1.8 hole 0.9: 1(10.16,0)
  oval 2.2x1.8 hole 0.9: 2(-10.16,0)
  silkscreen extent -13.33,-11.17 11.4,11.17, body extent -13.29,-10.87 11.21,11.13, height 8.5
"XTAL 32768 3x8" [mm]
  oval 2.2x1.8 hole 0.9: 1(0,0) 2(0,2.54)
  silkscreen extent 0.86,-0.3 8.76,2.77, body extent -0.28,-0.03 8.61,2.82, height 2.02

## Part data
C1 C2: "Capacitor"
D1: "Schottky Diode", Code_JEDEC=DO-214-AA, LatestRevisionDate=17-Jul-2002, LatestRevisionNote="Re-released for DXP Platform.", PackageDescription="DO-214-AA/SMB; 2 C-Bend Leads; Body 5.3 x 3.6 mm, inc. leads (LxW)", PackageReference=SMB, Published=8-Jun-2000, Publisher="Altium Limited"
H1: "Hole 3mm"
IC1: "Available in 1.8V, 2.5V, 2.85V, 3.3V, 5V, and  Adjustable Versions"
P1: "WR-PHD Pin Header, THT, pitch 2.54mm, Single Row, Vertical, 3p", Contact Resistance=20mOhm, Manufacturer="Wurth Elektronik", Operating Temperature="-40 to +105degC", Rated Current=3A, Withstanding Voltage=500VAC, Working Voltage=250VAC, ComponentLink1Description=Manufacturer, ComponentLink1URL=http://www.we-online.de, ComponentLink2Description=Datasheet, ComponentLink2URL=https://www.we-online.com/catalog/datasheet/61300311121.pdf, Gender="Pin Header", Manufacturer Part Number=61300311121, Mounting Technology=THT, Orientation=Vertical, Packaging=Bag, Pin Number=3, Pitch=2.54mm, Published Date="May 2020", Row Number=Single
P2: "WR-PHD Pin Header, THT, pitch 2.54mm, Single Row, Vertical, 16p", Contact Resistance=20mOhm, Manufacturer="Wurth Elektronik", Operating Temperature="-40 to +105degC", Rated Current=3A, Withstanding Voltage=500VAC, Working Voltage=250VAC, ComponentLink1Description=Manufacturer, ComponentLink1URL=http://www.we-online.de, ComponentLink2Description=Datasheet, ComponentLink2URL=https://www.we-online.com/catalog/datasheet/61301611121.pdf, Gender="Pin Header", Manufacturer Part Number=61301611121, Mounting Technology=THT, Orientation=Vertical, Packaging=Bag, Pin Number=16, Pitch=2.54mm, Published Date="May 2020", Row Number=Single
P3 P4: "Domino, 2-Pin", LatestRevisionDate=17-Jul-2002, LatestRevisionNote="Re-released for DXP Platform.", Publisher="Altium Limited"
P5: library part "VBAT CR2032", "CR2032", Manufacturer="DANTONA INDUSTRIES", Manufacturer Part Number="CR2032 SANYO", ComponentLink1Description=http://www.farnell.com/datasheets/1797668.pdf, ComponentLink1URL=http://www.farnell.com/datasheets/1797668.pdf, ComponentLink2Description=/datasheets/DANTONA/CRSANYO.pdf, ComponentLink2URL=/datasheets/DANTONA/CRSANYO.pdf, Pricing 1="1=0.768, 5=0.655, 10=0.615, 25=0.565, 50=0.51, 100=0.46, 250=0.41 (USD)", RoHS=NA, Stock 1=1694, Supplier 1=Newark
P6: "WR-PHD Pin Header, THT, pitch 2.54mm, Single Row, Vertical, 5p", Contact Resistance=20mOhm, Manufacturer="Wurth Elektronik", Operating Temperature="-40 to +105degC", Rated Current=3A, Withstanding Voltage=500VAC, Working Voltage=250VAC, ComponentLink1Description=Manufacturer, ComponentLink1URL=http://www.we-online.de, ComponentLink2Description=Datasheet, ComponentLink2URL=https://www.we-online.com/catalog/datasheet/61300511121.pdf, Gender="Pin Header", Manufacturer Part Number=61300511121, Mounting Technology=THT, Orientation=Vertical, Packaging=Bag, Pin Number=5, Pitch=2.54mm, Published Date="May 2020", Row Number=Single
Q1: "NPN Bipolar Transistor"
R1 R2 R3 R4 R5 R6: "Resistor"
U1: library part CMP-016-00004-3, "I2C Real-Time Clock, 5 V, 0 to 70 degC, 8-Pin DIP, RoHS, Tube", Case/Package=DIP, Manufacturer=Maxim, Max Operating Temperature=70°C, Max Supply Voltage=5.5V, Min Operating Temperature=0°C, Min Supply Voltage=4.5V, Nominal Supply Voltage=5V, Package Description="8-Pin Plastic Dual-In-Line, Narrow (0.3in) (P8-1), Body 9.375 x 6.985 mm, Pitch 2.54 mm", Package Quantity=50, Package Reference=P8-1, Package Version="Rev. E, 04/2011", Datasheet URL=https://datasheet.ciiva.com/20167/82-0567-20167410.pdf, Datasheet Version="Rev. 100208, 10/2008", Interface=Serial, Manufacturer URL=http://www.maximintegrated.com/, Mounting Technology=TH, Package URL=http://pdfserv.maximintegrated.com/package_dwgs/21-0043.PDF, Packaging=Rail/Tube, Pins=8, RoHS Compliant=True
U2: "Development board STM32F103C8T6", Supplier Part Number 1=59M2182, Supplier 1=Newark
VR1: library part "Var Resistor", "Var Resistor"
Y1: library part XTAL, "Crystal For all Crystal 2pin"

## Via types
v1: diameter 59.06, hole 28, Top Layer to Bottom Layer, 14 vias

## Nets (pads, with @x,y where several pads share a name; then routed paths per layer and width w, separated by ;. In a path a pad name is that pad's centre, name@x,y a point inside that pad or via, vN(x,y) a via of type N, cw(c..) or ccw(c..) an arc to the next point about the centre after c; other vN are vias at no path point)
3V3: P1.1 P6.2 U2.20 U2.38 | length 1212.6
  Bottom Layer w50: P1.1 980.43,1340.43 980.43,1395.71 1009.72,1425 1255,1425 ; 1395,890 1395,1089.5 1255,1229.5 1255,1425 ; P6.2 1440,1395.71 1410.71,1425 1255,1425
5V: B*1.1 C2.2 IC1.2 IC1.4 P2.2 R1.1 R2.2 R3.2 U1.8 U2.18 VR1.3 | length 10129.9
  Top Layer w30: v1(1185,735) 1187.5,737.5 1597.5,737.5 v1(1600,740)
  Bottom Layer w30: P2.2 3305,1495
  Bottom Layer w50: B*1.1 319.14,1130 404.14,1215 854,1215 ; IC1.2 IC1.4 1181.67,449.17 1182.5,450 C2.2 1185,590 ; R1.1 1185,590 ; U2.18 1595,747.45 1600,742.45 v1(1600,740) ; VR1.3 3730,315 3800,385 3800,470 ; R3.2 3887.5,145 3887.5,89.29 3916.79,60 4000,60 ; R2.2 3800,470 ; U1.8 4000,60 ; 854,1215 1010,1215 1185,1040 v1(1185,735) 1185,590 ; 854,1215 854,1434 915,1495 3305,1495 4280,1495 4590,1185 4590,104 4546,60 4095,60 ; 3800,470 3800,530 3875,605 4035,605 4095,545 4095,60 ; 4000,60 4095,60
ADC_PIN: R4.1 R5.2 U2.27 | length 298.5
  Bottom Layer w50: R4.1 R5.2 1992.5,435 1992.5,242.5 U2.27
BL: P2.15 U2.4 | length 1256.2
  Top Layer w30: v1(2520,945) 2522.5,942.5 2992.5,942.5 v1(2995,940)
  Bottom Layer w30: P2.15 2005,1322.13 2235.43,1091.69 2373.31,1091.69 v1(2520,945) ; U2.4 v1(2995,940)
BUZZER: R6.1 U2.26 | length 1501.1
  Top Layer w30: v1(1070,670) 1075,665 1695,665 v1(1700,660)
  Bottom Layer w30: R6.1 1067.5,1027.5 1067.5,672.5 v1(1070,670) ; v1(1700,660) 1695,655 1695,440 U2.26
CLK: P6.5 U2.10 | length 862.6
  Bottom Layer w30: P6.5 2070,1000 2242.87,1000 2395,847.87 U2.10
D4: P2.11 U2.5 | length 830.6
  Bottom Layer w30: P2.11 2408.18,1330 2436.49,1301.69 2437.14,1301.69 2479.14,1259.69 2710.31,1259.69 2895,1075 U2.5
D5: P2.12 U2.6 | length 816
  Bottom Layer w30: P2.12 2308.18,1330 2336.49,1301.69 2337.14,1301.69 2421.14,1217.69 2461.74,1217.69 2627.31,1217.69 2795,1050 U2.6
D6: P2.13 U2.7 | length 798.4
  Bottom Layer w30: P2.13 2208.18,1330 2236.49,1301.69 2237.14,1301.69 2363.14,1175.69 2444.35,1175.69 2468.7,1175.69 2539.31,1175.69 2695,1020 U2.7
D7: P2.14 U2.8 | length 780.8
  Bottom Layer w30: P2.14 2108.18,1330 2136.49,1301.69 2137.14,1301.69 2305.14,1133.69 2451.31,1133.69 2595,990 U2.8
DHT_PIN: P1.2 U2.25 | length 1390.3
  Bottom Layer w30: P1.2 1070,1245 1255,1060 1255,787.87 1795,247.87 U2.25
DT: P6.4 U2.11 | length 867.2
  Bottom Layer w30: P6.4 1640,1322.13 2004.13,958 2184.87,958 2295,847.87 U2.11
EN: P2.6 U2.3 | length 568.7
  Bottom Layer w30: P2.6 2905,1322.13 3095,1132.13 U2.3
GND: C1.1 C2.1 D2.2 IC1.1 P1.3 P2.1 P2.16 P4.2 P5.2 P6.1 Q1.1 R5.1 U1.4 U2.19 U2.39 U2.40 VR1.1 | length 14880.1
  Top Layer w30: v1(1268.47,355) v1(3365,355) ; v1(1600,950) 1602.5,947.5 2402.5,947.5 v1(2405,945) ; v1(2740,150) v1(3140,150)
  Bottom Layer w30: P4.2 450,240 ; C1.1 480,310 450,280 450,240 ; D2.2@728,592 Q1.1 ; IC1.1 1245.83,220.83 1268.47,243.47 v1(1268.47,355) ; P1.3 1170,1215 1315,1070 1315,810 1405,720 1470,720 1495,745 U2.19 1495,950 ; C2.1 1187.5,357.5 1265.97,357.5 v1(1268.47,355) ; v1@1268.47,360 v1(1268.47,355) ; P6.1 1340,1218.04 1495,1063.04 1495,950 ; v1(1600,950) 1495,950 ; P2.16 1905,1322.13 2177.43,1049.69 2300.31,1049.69 v1(2405,945) ; R5.1 3355,525 3445,435 3445,242.5 3447.5,240 ; v1(2740,150) 2738.6,150 2686.6,98 492,98 450,140 450,240 ; v1(3140,150) 3347.43,150 3365,167.57 3365,240 v1(3365,355) ; VR1.1 3537.87,240 3735,437.13 3735,887.3 3695.69,926.61 3695.69,944.31 P5.2 3672.13,960 3405,1227.13 P2.1 3735,1330 4300,765 U1.4 U1.4@4284.31,460.69
  Bottom Layer w50: C1.1 725.5,310 725.5,589.5 D2.2 ; U2.39 U2.40 3365,240 3447.5,240 VR1.1
I2C_SCL: R3.1 U1.6 U2.35 | length 1410.5
  Bottom Layer w30: U2.35 2795,232.13 2977.13,50 3697.5,50 3882.5,235 R3.1 3887.5,235 3997.5,345 U1.6
I2C_SDA: R2.1 U1.5 U2.36 | length 1366.1
  Bottom Layer w30: U2.36 2895,232.13 3035.13,92 3678.17,92 3815,228.83 3815,312.5 3882.5,380 R2.1 3895,390 3930,390 3985,445 U1.5
NetB*1_2: B*1.2 Q1.2 | length 175.3
  Bottom Layer w30: B*1.2 590.39,1129.61 764.61,1129.61 Q1.2
NetD1_1: D1.1 F1.2 | length 160.7
  Bottom Layer w50: D1.1 F1.2
NetD2_1: D2.1 R1.2 | length 149
  Bottom Layer w50: D2.1 R1.2
NetF1_1: F1.1 P3.1 | length 336.9
  Bottom Layer w50: P3.1 235.34,717.34 569.66,717.34 F1.1 F1.1@568.84,718.84
NetP2_3: P2.3 VR1.2 | length 1066
  Bottom Layer w30: P2.3 3205,1320 3375,1150 3375,695 VR1.2
NetP3_2: P3.2 P4.1 | length 201.4
  Bottom Layer w50: P4.1 P3.2
NetP5_1: P5.1 U1.3 | length 695.6
  Bottom Layer w50: U1.3 4310.31,345 4480,514.69 P5.1
NetQ1_3: Q1.3 R6.2 | length 172.9
  Bottom Layer w30: Q1.3 802.8,1030.39 974.61,1030.39 R6.2
NetU1_1: U1.1 Y1.2 | length 105
  Bottom Layer w30: U1.1 Y1.2
NetU1_2: U1.2 Y1.1 | length 251
  Bottom Layer w30: U1.2 4412.87,245 4505,152.87 Y1.1
RS: P2.4 U2.1 | length 568.7
  Bottom Layer w30: P2.4 3105,1322.13 3295,1132.13 U2.1
RW: P2.5 U2.2 | length 568.7
  Bottom Layer w30: P2.5 3005,1322.13 3195,1132.13 U2.2
SW: P6.3 U2.12 | length 867.2
  Bottom Layer w30: P6.3 1540,1322.13 1951.82,910.31 2120.86,910.31 2121.17,910 2132.87,910 2195,847.87 U2.12
Vin: C1.2 D1.2 IC1.3 R4.2 | length 1901.3
  Top Layer w20: v1@1782.5,522.5 v1(1785,525)
  Top Layer w30: v1(1325,530) 1327.5,527.5 1777.5,527.5 v1@1782.5,522.5
  Bottom Layer w30: C1.2 725,165 750,140 1280,140 1325,185 v1(1325,530) ; v1(1785,525) R4.2
  Bottom Layer w50: D1.2@571.61,220 C1.2 873.62,220 IC1.3
pads on no net: H1.1 LOGO1.1 P2.7 P2.8 P2.9 P2.10 U1.7 U2.9 U2.13 U2.14 U2.15 U2.16 U2.17 U2.21 U2.22 U2.23 U2.24 U2.28 U2.29 U2.30 U2.31 U2.32 U2.33 U2.34 U2.37

## Polygon pours and split planes (outlines as drawn)
GND on Bottom Layer "GND_L02_P000" (solid, remove dead copper, pour order 0): 0,-19.7 cw(c0,0) -19.7,0 -19.7,1574.8 cw(c0,1574.8) 0,1594.5 4724.41,1594.5 cw(c4724.41,1574.8) 4744.11,1574.8 4744.11,0 cw(c4724.41,0) 4724.41,-19.7

## Keep-outs
Keep-Out Layer:
  lines w39.37: 0,0 0,1574.8 4724.41,1574.8 4724.41,0 0,0

## Other copper
Bottom Layer:
  region: 442.97,1434.98 441.24,1434.98 441.24,1422.87 439.51,1422.87 439.51,1412.49 437.78,1412.49 437.78,1400.38 436.05,1400.38 436.05,1388.27 434.32,1388.27 434.32,1377.89 432.59,1377.89 432.59,1365.78 430.86,1365.78 430.86,1355.4 429.13,1355.4 429.13,1350.21 427.4,1350.21 427.4,1348.48 425.67,1348.48 425.67,1341.56 427.4,1341.56 427.4,1339.83 455.08,1339.83 455.08,1341.56 456.81,1341.56 456.81,1346.75 455.08,1346.75 455.08,1348.48 453.35,1348.48 453.35,1350.21 451.62,1350.21 451.62,1357.13 453.35,1357.13 453.35,1362.32 468.92,1362.32 468.92,1350.21 467.19,1350.21 467.19,1348.48 465.46,1348.48 465.46,1346.75 463.73,1346.75 463.73,1341.56 465.46,1341.56 465.46,1339.83 482.76,1339.83 482.76,1341.56 484.49,1341.56 484.49,1346.75 482.76,1346.75 482.76,1348.48 481.03,1348.48 481.03,1351.94 479.3,1351.94 479.3,1358.86 477.57,1358.86 477.57,1370.97 475.84,1370.97 475.84,1381.35 474.11,1381.35 474.11,1391.73 472.38,1391.73 472.38,1402.11 470.65,1402.11 470.65,1412.49 468.92,1412.49 468.92,1424.6 467.19,1424.6 467.19,1428.06 468.92,1428.06 468.92,1429.79 470.65,1429.79 470.65,1433.25 472.38,1433.25 472.38,1436.71 470.65,1436.71 470.65,1438.44 442.97,1438.44 hole: 460.27,1410.76 462,1410.76 462,1402.11 462,1400.38 462,1398.65 463.73,1398.65 463.73,1388.27 465.46,1388.27 465.46,1376.16 467.19,1376.16 467.19,1369.24 455.08,1369.24 455.08,1381.35 456.81,1381.35 456.81,1393.46 458.54,1393.46 458.54,1407.3 460.27,1407.3
  region: 550.23,1350.21 550.23,1348.48 543.31,1348.48 543.31,1350.21 541.58,1350.21 541.58,1355.4 539.85,1355.4 539.85,1360.59 538.12,1360.59 538.12,1362.32 536.39,1362.32 536.39,1364.05 531.2,1364.05 531.2,1362.32 529.47,1362.32 529.47,1357.13 531.2,1357.13 531.2,1345.02 532.93,1345.02 532.93,1341.56 534.66,1341.56 534.66,1339.83 576.18,1339.83 576.18,1341.56 577.91,1341.56 577.91,1346.75 576.18,1346.75 576.18,1348.48 574.45,1348.48 574.45,1350.21 572.72,1350.21 572.72,1429.79 576.18,1429.79 576.18,1433.25 577.91,1433.25 577.91,1436.71 576.18,1436.71 576.18,1438.44 545.04,1438.44 545.04,1429.79 548.5,1429.79 548.5,1428.06 550.23,1428.06 550.23,1351.94
  region: 156 vertices and 0 holes, not listed, extent 147.14,1339.83 190.39,1440.17
  region: 655.76,1436.71 652.3,1436.71 652.3,1434.98 648.84,1434.98 648.84,1433.25 647.11,1433.25 647.11,1431.52 645.38,1431.52 645.38,1429.79 643.65,1429.79 643.65,1428.06 641.92,1428.06 641.92,1424.6 640.19,1424.6 640.19,1421.14 638.46,1421.14 638.46,1415.95 636.73,1415.95 636.73,1409.03 635,1409.03 635,1370.97 636.73,1370.97 636.73,1364.05 638.46,1364.05 638.46,1358.86 640.19,1358.86 640.19,1355.4 641.92,1355.4 641.92,1351.94 643.65,1351.94 643.65,1350.21 645.38,1350.21 645.38,1348.48 647.11,1348.48 647.11,1346.75 648.84,1346.75 648.84,1345.02 650.57,1345.02 650.57,1343.29 654.03,1343.29 654.03,1341.56 660.95,1341.56 660.95,1339.83 695.55,1339.83 695.55,1341.56 697.28,1341.56 697.28,1348.48 695.55,1348.48 695.55,1350.21 693.82,1350.21 693.82,1351.94 692.09,1351.94 692.09,1428.06 693.82,1428.06 693.82,1429.79 695.55,1429.79 695.55,1431.52 697.28,1431.52 697.28,1438.44 655.76,1438.44 hole: 664.41,1431.52 669.6,1431.52 669.6,1353.67 669.6,1351.94 669.6,1346.75 664.41,1346.75 664.41,1348.48 662.68,1348.48 662.68,1350.21 660.95,1350.21 660.95,1428.06 662.68,1428.06 662.68,1429.79 664.41,1429.79
  region: 420.48,1379.62 420.48,1410.76 418.75,1410.76 418.75,1417.68 417.02,1417.68 417.02,1421.14 415.29,1421.14 415.29,1426.33 413.56,1426.33 413.56,1429.79 411.83,1429.79 411.83,1431.52 410.1,1431.52 410.1,1433.25 408.37,1433.25 408.37,1434.98 406.64,1434.98 406.64,1436.71 404.91,1436.71 404.91,1438.44 401.45,1438.44 401.45,1440.17 391.07,1440.17 391.07,1438.44 387.61,1438.44 387.61,1436.71 385.88,1436.71 385.88,1438.44 384.15,1438.44 384.15,1440.17 377.23,1440.17 377.23,1434.98 375.5,1434.98 375.5,1410.76 382.42,1410.76 382.42,1412.49 384.15,1412.49 384.15,1419.41 385.88,1419.41 385.88,1426.33 387.61,1426.33 387.61,1429.79 389.34,1429.79 389.34,1431.52 392.8,1431.52 392.8,1429.79 394.53,1429.79 394.53,1348.48 392.8,1348.48 392.8,1346.75 389.34,1346.75 389.34,1348.48 387.61,1348.48 387.61,1351.94 385.88,1351.94 385.88,1360.59 384.15,1360.59 384.15,1364.05 375.5,1364.05 375.5,1351.94 377.23,1351.94 377.23,1348.48 378.96,1348.48 378.96,1345.02 380.69,1345.02 380.69,1343.29 384.15,1343.29 384.15,1341.56 385.88,1341.56 385.88,1339.83 401.45,1339.83 401.45,1341.56 404.91,1341.56 404.91,1343.29 406.64,1343.29 406.64,1345.02 408.37,1345.02 408.37,1346.75 410.1,1346.75 410.1,1348.48 411.83,1348.48 411.83,1351.94 413.56,1351.94 413.56,1355.4 415.29,1355.4 415.29,1358.86 417.02,1358.86 417.02,1364.05 418.75,1364.05 418.75,1372.7 420.48,1372.7 420.48,1377.89
  region: 156 vertices and 0 holes, not listed, extent 193.85,1339.83 237.1,1440.17
  region: 266.51,1438.44 261.32,1438.44 261.32,1436.71 259.59,1436.71 259.59,1434.98 256.13,1434.98 256.13,1433.25 254.4,1433.25 254.4,1429.79 252.67,1429.79 252.67,1428.06 250.94,1428.06 250.94,1424.6 249.21,1424.6 249.21,1421.14 247.48,1421.14 247.48,1417.68 245.75,1417.68 245.75,1412.49 244.02,1412.49 244.02,1403.84 242.29,1403.84 242.29,1386.54 242.29,1384.81 242.29,1374.43 244.02,1374.43 244.02,1367.51 245.75,1367.51 245.75,1362.32 247.48,1362.32 247.48,1357.13 249.21,1357.13 249.21,1353.67 250.94,1353.67 250.94,1351.94 252.67,1351.94 252.67,1348.48 254.4,1348.48 254.4,1346.75 256.13,1346.75 256.13,1345.02 257.86,1345.02 257.86,1343.29 261.32,1343.29 261.32,1341.56 264.78,1341.56 264.78,1339.83 280.35,1339.83 280.35,1341.56 285.54,1341.56 285.54,1343.29 287.27,1343.29 287.27,1345.02 289,1345.02 289,1346.75 290.73,1346.75 290.73,1348.48 292.46,1348.48 292.46,1350.21 294.19,1350.21 294.19,1353.67 295.92,1353.67 295.92,1357.13 297.65,1357.13 297.65,1360.59 299.38,1360.59 299.38,1367.51 301.11,1367.51 301.11,1374.43 302.84,1374.43 302.84,1403.84 301.11,1403.84 301.11,1412.49 299.38,1412.49 299.38,1417.68 297.65,1417.68 297.65,1422.87 295.92,1422.87 295.92,1426.33 294.19,1426.33 294.19,1428.06 292.46,1428.06 292.46,1429.79 290.73,1429.79 290.73,1433.25 289,1433.25 289,1434.98 285.54,1434.98 285.54,1436.71 283.81,1436.71 283.81,1438.44 278.62,1438.44 278.62,1440.17 266.51,1440.17 hole: 269.97,1433.25 275.16,1433.25 275.16,1431.52 276.89,1431.52 276.89,1369.24 276.89,1367.51 276.89,1348.48 275.16,1348.48 275.16,1346.75 269.97,1346.75 269.97,1348.48 268.24,1348.48 268.24,1431.52 269.97,1431.52
  region: 486.22,1438.44 482.76,1438.44 482.76,1422.87 481.03,1422.87 481.03,1417.68 482.76,1417.68 482.76,1415.95 489.68,1415.95 489.68,1419.41 491.41,1419.41 491.41,1428.06 493.14,1428.06 493.14,1431.52 496.6,1431.52 496.6,1350.21 494.87,1350.21 494.87,1348.48 493.14,1348.48 493.14,1346.75 491.41,1346.75 491.41,1343.29 493.14,1343.29 493.14,1341.56 494.87,1341.56 494.87,1339.83 522.55,1339.83 522.55,1341.56 524.28,1341.56 524.28,1348.48 522.55,1348.48 522.55,1350.21 520.82,1350.21 520.82,1351.94 519.09,1351.94 519.09,1431.52 524.28,1431.52 524.28,1428.06 526.01,1428.06 526.01,1417.68 527.74,1417.68 527.74,1415.95 536.39,1415.95 536.39,1429.79 534.66,1429.79 534.66,1438.44 487.95,1438.44
  region: 122.92,1466.12 119.46,1466.12 119.46,1464.39 116,1464.39 116,1462.66 114.27,1462.66 114.27,1459.2 112.54,1459.2 112.54,1455.74 110.81,1455.74 110.81,1310.42 112.54,1310.42 112.54,1306.96 114.27,1306.96 114.27,1303.5 116,1303.5 116,1301.77 119.46,1301.77 119.46,1300.04 122.92,1300.04 122.92,1298.31 719.77,1298.31 719.77,1300.04 723.23,1300.04 723.23,1301.77 726.69,1301.77 726.69,1303.5 728.42,1303.5 728.42,1306.96 730.15,1306.96 730.15,1310.42 731.88,1310.42 731.88,1455.74 730.15,1455.74 730.15,1459.2 728.42,1459.2 728.42,1462.66 726.69,1462.66 726.69,1464.39 723.23,1464.39 723.23,1466.12 719.77,1466.12 719.77,1467.85 122.92,1467.85 hole: 124.65,1457.47 718.04,1457.47 718.04,1455.74 719.77,1455.74 719.77,1454.01 721.5,1454.01 721.5,1312.15 719.77,1312.15 719.77,1310.42 718.04,1310.42 718.04,1308.69 124.65,1308.69 124.65,1310.42 122.92,1310.42 122.92,1312.15 121.19,1312.15 121.19,1454.01 122.92,1454.01 122.92,1455.74 124.65,1455.74
  region: 327.06,1436.71 323.6,1436.71 323.6,1434.98 320.14,1434.98 320.14,1433.25 318.41,1433.25 318.41,1431.52 316.68,1431.52 316.68,1429.79 314.95,1429.79 314.95,1428.06 313.22,1428.06 313.22,1424.6 311.49,1424.6 311.49,1419.41 309.76,1419.41 309.76,1410.76 309.76,1409.03 309.76,1403.84 311.49,1403.84 311.49,1398.65 313.22,1398.65 313.22,1396.92 314.95,1396.92 314.95,1395.19 316.68,1395.19 316.68,1393.46 318.41,1393.46 318.41,1391.73 320.14,1391.73 320.14,1390 323.6,1390 323.6,1388.27 327.06,1388.27 327.06,1386.54 321.87,1386.54 321.87,1384.81 320.14,1384.81 320.14,1383.08 316.68,1383.08 316.68,1381.35 314.95,1381.35 314.95,1377.89 313.22,1377.89 313.22,1374.43 311.49,1374.43 311.49,1350.21 309.76,1350.21 309.76,1348.48 308.03,1348.48 308.03,1341.56 309.76,1341.56 309.76,1339.83 328.79,1339.83 328.79,1341.56 330.52,1341.56 330.52,1343.29 332.25,1343.29 332.25,1346.75 333.98,1346.75 333.98,1381.35 335.71,1381.35 335.71,1383.08 344.36,1383.08 344.36,1351.94 342.63,1351.94 342.63,1348.48 340.9,1348.48 340.9,1341.56 342.63,1341.56 342.63,1339.83 368.58,1339.83 368.58,1341.56 370.31,1341.56 370.31,1343.29 372.04,1343.29 372.04,1346.75 370.31,1346.75 370.31,1350.21 366.85,1350.21 366.85,1429.79 370.31,1429.79 370.31,1431.52 372.04,1431.52 372.04,1436.71 370.31,1436.71 370.31,1438.44 327.06,1438.44 hole: 337.44,1431.52 344.36,1431.52 344.36,1391.73 335.71,1391.73 335.71,1395.19 333.98,1395.19 333.98,1403.84 333.98,1405.57 333.98,1428.06 335.71,1428.06 335.71,1429.79 337.44,1429.79
  region: 602.13,1355.4 602.13,1348.48 595.21,1348.48 595.21,1350.21 593.48,1350.21 593.48,1353.67 591.75,1353.67 591.75,1358.86 590.02,1358.86 590.02,1362.32 588.29,1362.32 588.29,1364.05 581.37,1364.05 581.37,1355.4 583.1,1355.4 583.1,1345.02 584.83,1345.02 584.83,1341.56 586.56,1341.56 586.56,1339.83 628.08,1339.83 628.08,1341.56 629.81,1341.56 629.81,1348.48 626.35,1348.48 626.35,1350.21 624.62,1350.21 624.62,1429.79 628.08,1429.79 628.08,1431.52 629.81,1431.52 629.81,1438.44 586.56,1438.44 586.56,1436.71 584.83,1436.71 584.83,1428.06 583.1,1428.06 583.1,1417.68 590.02,1417.68 590.02,1419.41 591.75,1419.41 591.75,1424.6 593.48,1424.6 593.48,1428.06 595.21,1428.06 595.21,1431.52 602.13,1431.52 602.13,1396.92 595.21,1396.92 595.21,1400.38 593.48,1400.38 593.48,1405.57 591.75,1405.57 591.75,1407.3 588.29,1407.3 588.29,1405.57 586.56,1405.57 586.56,1403.84 584.83,1403.84 584.83,1381.35 586.56,1381.35 586.56,1379.62 593.48,1379.62 593.48,1384.81 595.21,1384.81 595.21,1388.27 596.94,1388.27 596.94,1390 602.13,1390 602.13,1357.13

## Text inside footprints (layer, text, board x,y; h text height)
B*1: Top Overlay "+" at 90,1030 h112.5
LOGO1: Bottom Overlay "PIF" at 467.57,823.47 h37.5
P2: Bottom Overlay "1" at 3409.72,1396.93 h40; Bottom Overlay "16" at 1929.8,1396.93 h40
P6: Top Overlay "5" at 1725.04,1396.93 h40; Top Overlay "1" at 1335.28,1396.93 h40